# Altium PCB A3000_4MB.pcbdoc
Units mil, origin at the board's own origin, x right, y up, seen from the top; angles counter-clockwise.
Board outline 6800 x 990 mil, 4 copper layers (TopLayer, GND, VCC, BottomLayer), stack 65.297 mil thick; 13 components, 51 nets, 160 pads, 86 vias.
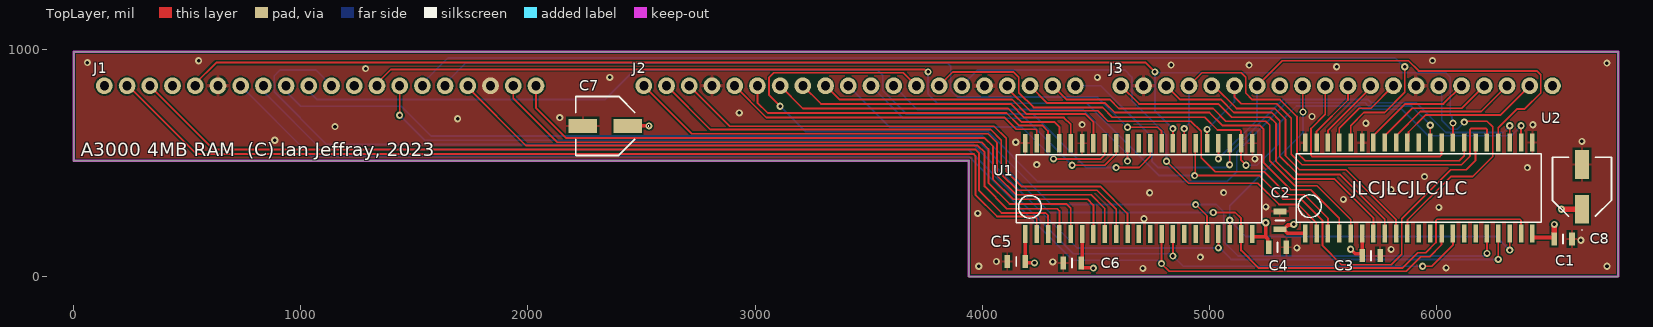
[diagram p0: TopLayer view]
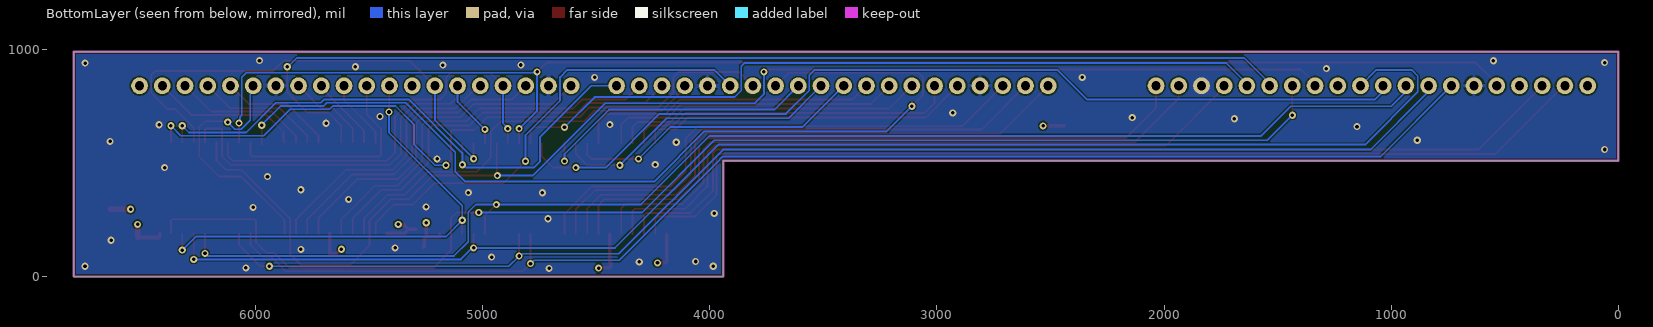
[diagram p1: BottomLayer view, seen from below]
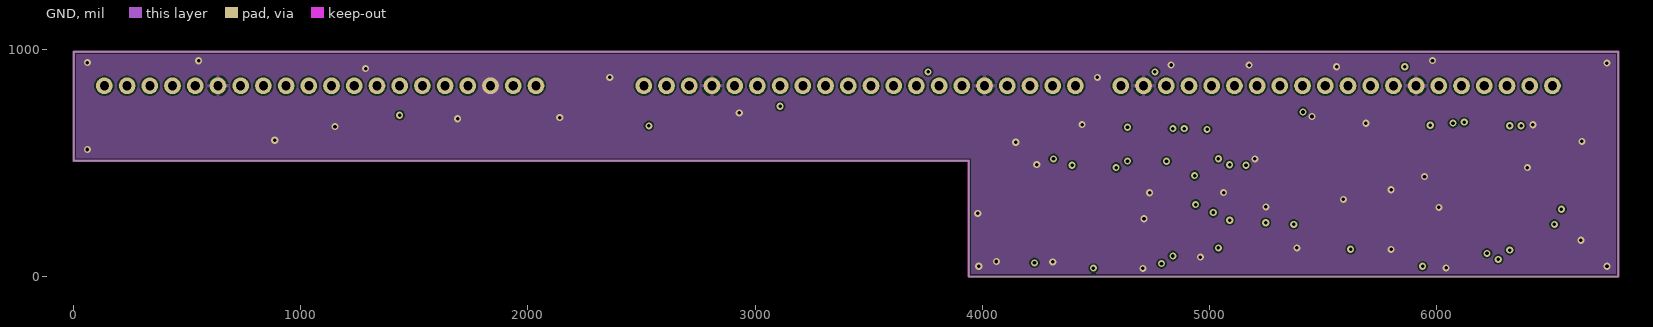
[diagram p2: GND]
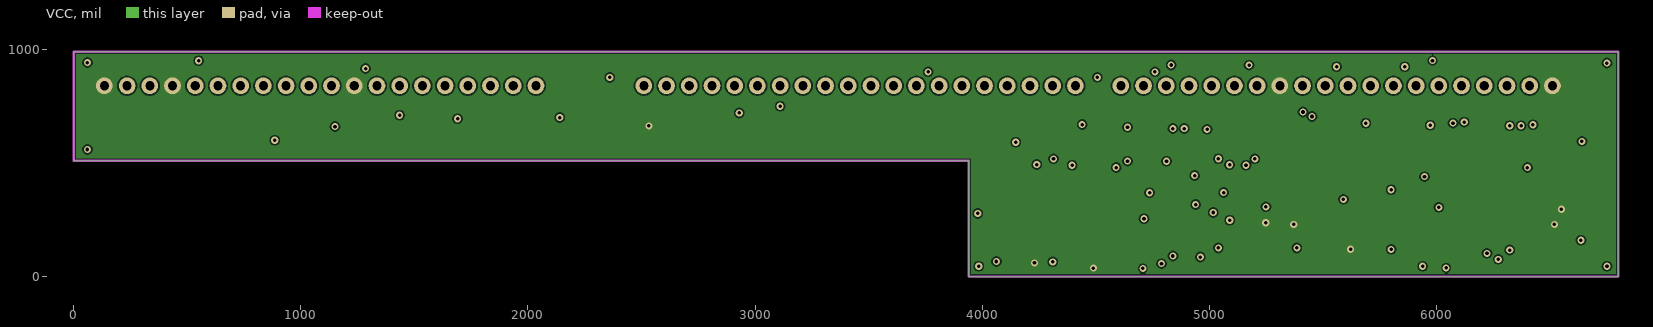
[diagram p3: VCC]
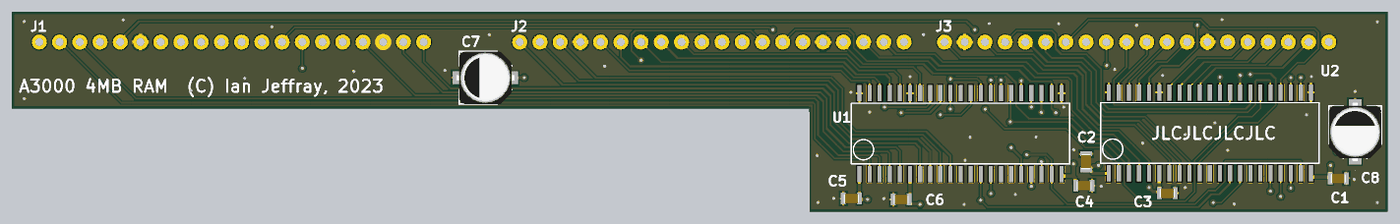
[diagram p4: 3D render of the assembled board from above, using the file's embedded part models]

## Layer stack, top to bottom
TopSolder: solder mask 0.3941, Solder Resist, Dk 3.5
TopLayer: signal copper 1.4169
Dielectric 1: prepreg 8.2, PP-022, Dk 4.5
GND: signal copper 1.378
Dielectric 2: core 43.3071, Core-043, Dk 4.3
VCC: signal copper 1.378
Dielectric 3: prepreg 8.2, PP-022, Dk 4.5
BottomLayer: signal copper 1.4169
BottomSolder: solder mask 0.3941, Solder Resist, Dk 3.5

## Board outline
3940,0 3940,510 0,510 0,990 6800,990 6800,0

## Design rules (kind name [scope] priority, off if disabled: settings)
BoardOutlineClearance [All] p1: gap=11.81 ignorepadtopadclearanceinfootprint=FALSE
Clearance [All] p1: gap=6.69 ignorepadtopadclearanceinfootprint=FALSE except(11.81: Via-Via; 19.68: Via-Hole)
ComponentClearance ComponentClearance_Z2_Z3 [(InComponent('Z2') OR InComponent('Z3')) vs InComponent('No Component')] p1: gap=0 collisioncheckmode=3 verticalgap=0 showdistances=FALSE
ComponentClearance ComponentClearance_U4_J104 [All] p2: gap=0 collisioncheckmode=3 verticalgap=0 showdistances=FALSE
ComponentClearance ComponentClearance_J3_J4 [InComponent('J3') vs InComponent('J4')] p3: gap=0 collisioncheckmode=3 verticalgap=0 showdistances=FALSE
ComponentClearance ComponentClearance_J103_J104 [InComponent('J103') vs InComponent('J104')] p4: gap=0 collisioncheckmode=3 verticalgap=0 showdistances=FALSE
ComponentClearance [All] p5: gap=10 collisioncheckmode=3 verticalgap=10 showdistances=FALSE
DiffPairsRouting [InDifferentialPairClass('All Differential Pairs')] p1: maxlimit=10 minlimit=4.51 mostfreqgap=6.69 toplayer_mingap=6.69 toplayer_minwidth=7.87 toplayer_maxwidth=15 toplayer_prefwidth=9.32 midlayer1_prefgap=4.53 midlayer1_minwidth=15 midlayer1_maxwidth=15 midlayer1_prefwidth=15 midlayer2_prefgap=4.53 midlayer2_minwidth=15 midlayer2_maxwidth=15 midlayer2_prefwidth=15 bottomlayer_mingap=6.69 bottomlayer_minwidth=7.87 bottomlayer_maxwidth=15 bottomlayer_prefwidth=9.32 maxuncoupledlength=500
FabricationTestPointUsage TestPointUsage [All] p1: valid=0 allowmultiple=FALSE
FabricationTestpoint Testpoint [All] p1: side=3 testpointundercomponent=TRUE minsize=40 maxsize=100 preferedsize=60 minholesize=20 maxholesize=40 preferedholesize=32 testpointgrid=1 allowsidetop=TRUE allowsidebottom=TRUE usegrid=TRUE gridtolerance=0.01
HoleSize [All] p1: absolutevalues=TRUE maxlimit=216.54 minlimit=7.87 maxpercent=80.000 minpercent=20.000
HoleToHoleClearance [All] p1: gap=9.84 allowstackedmicrovias=FALSE
MinimumSolderMaskSliver [All] p1: minsoldermaskwidth=0.79
PlaneClearance [All] p1: clearance=7.87
PlaneConnect [All] p1: pad.planeconnectstyle=Relief pad.reliefexpansion=20 pad.reliefentries=4 pad.reliefconductorwidth=10 pad.reliefairgap=10 via.planeconnectstyle=Direct via.reliefexpansion=20 via.reliefentries=4 via.reliefconductorwidth=10 via.reliefairgap=10
PolygonConnect [All] p1: thpad.connectstyle=Relief thpad.reliefconductorwidth=10 thpad.reliefentries=4 thpad.polygonreliefangle="90 Angle" thpad.airgapwidth=10 smdpad.connectstyle=Relief smdpad.reliefconductorwidth=10 smdpad.reliefentries=4 smdpad.polygonreliefangle="90 Angle" smdpad.airgapwidth=10 via.connectstyle=Direct via.reliefconductorwidth=10 via.reliefentries=4 via.polygonreliefangle="90 Angle" via.airgapwidth=10
RoutingLayers [All] p1: top layer_v5=TRUE mid layer 1_v5=FALSE mid layer 2_v5=FALSE bottom layer_v5=TRUE
RoutingVias [All] p1: holewidth=15.75 width=31.5 viastyle="Through Hole" minholewidth=15.75 minwidth=31.5 maxholewidth=15.75 maxwidth=31.5
SilkToSilkClearance [All] p1: silktosilkclearance=3.94
SilkToSolderMaskClearance SilkscreenOverComponentPads [IsPad] p1: minsilkscreentomaskgap=3.94 clearancetoexposedcopper=TRUE
SolderMaskExpansion [All] p1: expansion=2.95 istentingtop=FALSE
Width [All] p1: maxlimit=196.85 minlimit=5.91 preferedwidth=7.87
18 further rules are at their usual default settings.

## Components (designator, comment, footprint, x,y, rotation, side; value= is the part's Value field where it differs from the comment)
C1 "100nF" CAPC2012X145N 6556.87,164.88 r0 top
C2 "100nF" CAPC2012X145N 5310,247.16 r90 top
C3 "100nF" CAPC2012X145N 5711.86,92.08 r0 top
C4 "100nF" CAPC2012X145N 5299.57,129 r0 top
C5 "100nF" CAPC2012X145N 4149.41,65.97 r180 top
C6 "100nF" CAPC2012X145N 4395.58,60 r180 top
C7 "47uF" EEE1AA101SP 2340,663.25 r180 top
C8 "47uF" EEE1AA101SP 6640,395.18 r90 top
J1 "CONN_20" 1X20 135,840 r0 top locked
J2 "CONN_20" 1X20 2510,840 r0 top locked
J3 "CONN_20" 1X20 4610,840 r0 top locked
U1 "IS41C16105C" SOJ-42 4689.41,387 r0 top locked
U2 "IS41C16105C" SOJ-42 5921.86,390 r0 top locked

## Footprints (in the part's own frame and the unit in brackets; to place one, negate y for a bottom-side part, rotate by r counter-clockwise, add the part's x,y. Pads: shape width x height; smd on the part's side, far side on the other; paste and mask are expansions set on the pad)
1X20 [mil] "1X20"
  round 74 hole 40: 1(0,0) 2(100,0) 3(200,0) 4(300,0) 5(400,0) 6(500,0) 7(600,0) 8(700,0) 9(800,0) 10(900,0) 11(1000,0) 12(1100,0) 13(1200,0) 14(1300,0) 15(1400,0) 16(1500,0) 17(1600,0) 18(1700,0) 19(1800,0) 20(1900,0)
  body extent -37,-37 1937,37, height 150
CAPC2012X145N [mm]
  rect 0.62x1.47 smd: 1(-1,0) 2(1,0)
  silkscreen extent 0,-0.52 0,0.53, body extent -1,-0.63 1,0.63, height 1.45
EEE1AA101SP [mm]
  rect 3.2x1.6 smd: 1(-2.5,0) 2(2.5,0)
  silkscreen extent -4.88,-3.3 3.3,3.3, body extent 0,0 0,0
SOJ-42 [mil]
  rect 20x80 smd mask+7.87: 1(-500,-200) 2(-450,-200) 3(-400,-200) 4(-350,-200) 5(-300,-200) 6(-250,-200) 7(-200,-200) 8(-150,-200) 9(-100,-200) 10(-50,-200) 11(0,-200) 12(50,-200) 13(100,-200) 14(150,-200) 15(200,-200) 16(250,-200) 17(300,-200) 18(350,-200) 19(400,-200) 20(450,-200) 21(500,-200) 22(500,200) 23(450,200) 24(400,200) 25(350,200) 26(300,200) 27(250,200) 28(200,200) 29(150,200) 30(100,200) 31(50,200) 32(0,200) 33(-50,200) 34(-100,200) 35(-150,200) 36(-200,200) 37(-250,200) 38(-300,200) 39(-350,200) 40(-400,200) 41(-450,200) 42(-500,200)
  silkscreen extent -540,-150 540,150

## Part data
C1 C2 C3 C4 C5 C6: library part C2012X7R1H104K125AM, "Capacitor", Manufacturer_Name=TDK, Mouser Part Number=810-C2012X7R1H104KT5, Arrow Part Number=C2012X7R1H104K125AM, Arrow Price/Stock=https://www.arrow.com/en/products/c2012x7r1h104k125am/tdk, Datasheet Link=https://product.tdk.com/info/en/catalog/datasheets/mlcc_commercial_midvoltage_en.pdf, Height=1.45mm, Manufacturer_Part_Number=C2012X7R1H104K125AM, Mouser Price/Stock=https://www.mouser.com/Search/Refine.aspx?Keyword=810-C2012X7R1H104KT5
C7 C8: library part EEE1VA470WP, "Capacitor Polarised", Manufacturer_Name=Panasonic, Datasheet Link=http://industrial.panasonic.com/cdbs/www-data/pdf/RDE0000/ABA0000C1145.pdf, Height=7.8mm, Manufacturer_Part_Number=EEE1VA470WP
U1 U2: library part DRAM_1MX16_SOJ
J1 J2 J3: DeviceSetName=CONN_20, GateName_1=G$1, LibraryName=SparkFun-Connectors, SymbolName_1=CONN_20

## Via types
v1: diameter 31.5, hole 15.75, TopLayer to BottomLayer, tented both sides, 86 vias

## Nets (pads, with @x,y where several pads share a name; then routed paths per layer and width w, separated by ;. In a path a pad name is that pad's centre, name@x,y a point inside that pad or via, vN(x,y) a via of type N, cw(c..) or ccw(c..) an arc to the next point about the centre after c; other vN are vias at no path point)
A0: J1.9 U1.17 U2.17 | length 5942.1
  TopLayer w7.87: v1(4939.41,317.16) 4989.41,267.16 U1.17 ; v1(6221.86,102.16) U2.17
  BottomLayer w7.87: J1.9@910,840 1000,750 1441.5,750 1572.34,619.16 4000.84,619.16 4302.84,317.16 v1(4939.41,317.16) 5029.84,317.16 5062.58,284.42 5062.58,154.1 5126.02,90.67 6210.37,90.67 v1(6221.86,102.16)
A1: J1.11 U1.18 U2.18 | length 6231.5
  TopLayer w7.87: v1(5039.41,126.25) U1.18 ; v1(6271.86,75.78) U2.18
  BottomLayer w7.87: J1.11 1065,910 910,910 883,883 883,812.84 1114.68,581.16 3962.1,581.16 4417.01,126.25 5045.01,126.25 5095.48,75.78 v1(6271.86,75.78)
A2: J3.9 U1.19 U2.19 | length 2147.4
  TopLayer w7.87: U1.19 v1(5089.41,247.75) ; J3.9 5410.93,839.07 5410.93,725.42 v1(5411.86,724.49) ; v1(6321.86,116.69) U2.19
  BottomLayer w7.87: v1(5411.86,724.49) 5411.86,634.02 5089.41,311.57 v1(5089.41,247.75) 5161,176.16 6262.39,176.16 v1(6321.86,116.69)
A3: J1.14 U1.20 U2.20 | length 5633.6
  TopLayer w7.87: v1(1435,710.42) J1.14 ; v1(5016.58,282.16) 5113.58,282.16 5139.41,256.33 U1.20 5139.41,115.16 5216.98,37.59 5849.01,37.59 5916.26,104.84 5951.74,104.84 5997.29,150.39 5997.29,247.78 6001.9,252.4 6367.25,252.4 6371.86,247.78 U2.20
  BottomLayer w7.87: v1(1435,710.42) 1545.26,600.16 3979.75,600.16 4297.75,282.16 v1(5016.58,282.16)
A4: J2.14 U1.23 U2.23 | length 3177.3
  TopLayer w7.87: J2.14 3871.16,901.16 4136.41,901.16 4160.77,876.8 4160.77,809.97 4226.1,744.65 4529.09,744.65 4571.88,701.86 4978.88,701.86 5035.58,645.16 5134.8,645.16 5139.41,640.55 5139.41,511.75 v1(5161,490.16) ; U2.23 v1(6371.86,663.89)
  BottomLayer w7.87: v1(5161,490.16) 5209.3,490.16 5302.37,583.22 5302.37,670.09 5383.14,750.87 5659.42,750.87 5673.99,736.3 5846.48,736.3 5962.86,619.92 6327.89,619.92 v1(6371.86,663.89)
A5: J2.20 U1.24 U2.24 | length 2520
  TopLayer w7.87: v1(5088.58,492.38) 5089,492.8 5089,556.74 5089.41,557.16 U1.24 ; U2.24 v1(6321.86,663.89)
  BottomLayer w7.87: J2.20 4522.2,840 4746.64,615.57 4746.64,507.82 4762.07,492.38 4762.07,491.79 4773.86,480 5072.16,480 5084.54,492.38 v1(5088.58,492.38) 5088.58,543.58 5325,780 5697.11,780 5711.68,765.43 5910.03,765.43 6040.98,634.49 6292.46,634.49 v1(6321.86,663.89)
A6: J3.7 U1.25 U2.25 | length 2175.1
  TopLayer w7.87: v1(5039.41,518.76) U1.25 ; J3.7 5320,950 5876.47,950 5921.05,905.42 6441.32,905.42 6458.58,888.16 6458.58,808.16 6388.58,738.16 6354.86,738.16 6271.86,655.16 U2.25
  BottomLayer w7.87: v1(5039.41,518.76) 5210,689.35 J3.7
A7: J3.6 U1.26 U2.26 | length 1873
  TopLayer w7.87: U1.26 4989.41,647.99 v1(4989.58,648.16) ; J3.6 5110,791.67 5140.51,761.16 5295.66,761.16 5360.58,696.23 5360.58,539.44 5407.64,492.38 6109.81,492.38 6147.23,529.8 6147.23,647.25 6151.84,651.86 6217.25,651.86 6221.86,647.25 U2.26
  BottomLayer w7.87: v1(4989.58,648.16) 5110,768.58 J3.6
A8: J1.13 U1.27 U2.27 | length 5855.4
  TopLayer w7.87: J1.13 1335,850 1397,912 3745.16,912 3756,901.16 v1(3761.58,901.16) ; U1.27 4937.21,584.79 4937.21,446.87 v1(4935,444.66) 5220.59,444.66 5325.25,340 5404.74,340 5498.16,246.58 5498.16,135.45 5581.45,52.16 5695.58,52.16 5800,52.16 5847,99.16 5847,254.89 6062.11,470 6130.42,470 6171.86,511.44 U2.27
  BottomLayer w7.87: v1(3761.58,901.16) 3761.58,803.16 3801.51,763.23 4460.52,763.23 4779.09,444.66 v1(4935,444.66)
A9: J3.4 U1.28 U2.28 | length 1858.1
  TopLayer w7.87: U1.28 v1(4889.41,651.52) ; J3.4 4967.16,897.16 5140.41,897.16 5159.58,877.99 5159.58,808.16 5188.58,779.16 5310.51,779.16 5385,704.67 5385,546.42 5421.26,510.16 6100.18,510.16 6121.86,531.84 U2.28
  BottomLayer w7.87: v1(4889.41,651.52) 4889.41,654.89 4910,675.48 J3.4
CAS0: J1.10 U1.31 | length 4103.8
  TopLayer w7.87: v1(4589.41,480) 4690,480 4739.41,529.41 U1.31
  BottomLayer w7.87: J1.10@1010,840 1070,780 2340,780 2470,910 3538.16,910 3561.58,886.58 3561.58,819.16 3664.58,716.16 4221.51,716.16 4457.66,480 v1(4589.41,480)
CAS1: J1.16 U1.30 | length 3441.2
  TopLayer w7.87: v1(4639.41,657.23) 4771.38,657.23 4789.41,639.2 U1.30
  BottomLayer w7.87: J1.16 1635,850 1725,940 3847.74,940 3861.58,926.16 3861.58,819.16 3890.74,790 4506.65,790 v1(4639.41,657.23)
CAS2: J2.13 U2.31 | length 4147.4
  TopLayer w7.87: v1(3110,750) 3061.58,798.42 3061.58,876.74 3082,897.16 3652.84,897.16 J2.13 ; U2.31@5971.99,581.54 v1(5971.99,666.17)
  BottomLayer w7.87: v1(3110,750) 3220.84,639.16 4023.33,639.16 4244.2,418.29 5076.07,418.29 5120,462.22 5120,547.42 5338.02,765.43 5685.17,765.43 5699.73,750.87 5889.31,750.87 5971.99,668.19 v1(5971.99,666.17)
CAS3: J3.10 U2.30 | length 965.9
  TopLayer w7.87: J3.10 5510,714.52 5447,651.52 5447,533.86 5451.61,529.25 6015.25,529.25 6021.86,535.87 U2.30
D0: J1.3 U1.3 | length 4369.8
  TopLayer w7.87: J1.3 615,560 3969.46,560 3985,544.46 3985,380 4085,280 4279.32,280 4289.41,269.91 U1.3
D1: J1.2 U1.2 | length 4415.6
  TopLayer w7.87: J1.2 240,840 540,540 3961.7,540 3969.51,532.19 3969.51,359.91 4064.66,264.76 4229.61,264.76 4239.41,254.96 U1.2
D2: J1.19 U1.5 | length 2910.7
  TopLayer w7.87: J1.19 1935,784.43 2128.22,591.21 3997.44,591.21 4027,561.65 4027,413 4120,320 4369.41,320 4389.41,300 U1.5
D3: J1.17 U1.4 | length 3026.4
  TopLayer w7.87: J1.17 1735,833 1991.36,576.64 3980.2,576.64 4010,546.84 4010,396.91 4108.18,298.73 4329.41,298.73 4339.41,288.73 U1.4
D4: J1.20 U1.7 | length 2941.1
  TopLayer w7.87: J1.20 2035,742.43 2166.77,610.66 4009.35,610.66 4047,573 4047,429.16 4136.16,340 4464.18,340 4489.41,314.76 U1.7
D5: J2.1 U1.8 | length 2450.8
  TopLayer w7.87: J2.1 2721.07,628.93 4025.03,628.93 4064.66,589.29 4064.66,444.66 4149.41,359.91 4479.41,359.91 4539.41,299.91 U1.8
D6: J2.3 U1.10 | length 2337.4
  TopLayer w7.87: J2.3 2888,662 4051.56,662 4105.04,608.51 4105.04,464.2 4172.33,396.91 4520,396.91 4639.41,277.5 U1.10
D7: J2.2 U1.9 | length 2401.2
  TopLayer w7.87: J2.2 2802.57,647.43 4037.49,647.43 4083.84,601.08 4083.84,451.41 4155.25,380 4505.08,380 4589.41,295.67 U1.9
D8: J2.5 U1.41 | length 1467.4
  TopLayer w7.87: J2.5 3050,700 4098.09,700 4149.89,648.2 4234.8,648.2 4239.41,643.59 U1.41
D9: J2.6 U1.40 | length 1459.1
  TopLayer w7.87: J2.6 3010,765.57 3055.57,720 3102.91,720 4106.43,720 4161,665.43 4264.35,665.43 4289.41,640.37 U1.40
D10: J2.8 U1.38 | length 1332.8
  TopLayer w7.87: J2.8 3290,760 4124.57,760 4184.57,700 4359.41,700 4389.41,670 U1.38
D11: J2.7 U1.39 | length 1377
  TopLayer w7.87: J2.7 3210,740 4113.93,740 4173.93,680 4319.41,680 4339.41,660 U1.39
D12: J2.9 U1.36 | length 1339.9
  TopLayer w7.87: J2.9 3370,780 4130.62,780 4195.11,715.51 4455.9,715.51 4489.41,682 U1.36
D13: J2.10 U1.35 | length 1321
  TopLayer w7.87: v1(4313.58,518.16) 4521.41,518.16 4539.41,536.16 U1.35
  BottomLayer w7.87: J2.10 3590.84,659.16 4172.58,659.16 v1(4313.58,518.16)
D14: J2.12 U1.33 | length 1264
  TopLayer w7.87: v1(4639.41,508.16) U1.33
  BottomLayer w7.87: J2.12 3714.84,735.16 4443.59,735.16 4639.41,539.33 v1(4639.41,508.16)
D15: J2.11 U1.34 | length 1291.4
  TopLayer w7.87: v1(4395.58,490.16) 4538.58,490.16 4589.41,540.99 U1.34
  BottomLayer w7.87: J2.11 3652.84,697.16 4188.58,697.16 v1(4395.58,490.16)
D16: J2.15 U2.2 | length 2043.8
  TopLayer w7.87: v1(4811,507.82) 4907.77,411.05 5212.79,411.05 5306.55,317.29 5390.46,317.29 5470.55,237.2 5470.55,191.31 U2.2
  BottomLayer w7.87: J2.15 3980,910 4627,910 4658.58,878.42 4658.58,775.28 4811,622.86 v1(4811,507.82)
D17: J2.17 U2.3 | length 1793.4
  TopLayer w7.87: J2.17 4110,830 4209.92,730.08 4507.64,730.08 4553.56,684.16 4918.58,684.16 4963.79,638.95 4963.79,523.78 5026.41,461.16 5241.57,461.16 5342.82,359.91 5418.45,359.91 5521.86,256.5 U2.3
D18: J2.19 U2.5 | length 1709.4
  TopLayer w7.87: J2.19 4370,780 4560.57,780 4600.57,740 5016.26,740 5072.11,684.16 5248.77,684.16 5265.75,667.18 5265.75,509.29 5375.54,399.5 5473.5,399.5 5621.86,251.14 U2.5
D19: J2.18 U2.4 | length 1756
  TopLayer w7.87: J2.18 4286.3,763.7 4541.51,763.7 4582.98,722.23 5000,722.23 5056.8,665.43 5221.21,665.43 5238.58,648.06 5238.58,501.42 5357.97,382.03 5446.33,382.03 5571.86,256.5 U2.4
D20: J3.1 U2.7 | length 1518.5
  TopLayer w7.87: J3.1 4690,760 5039.41,760 5097.55,701.86 5265.75,701.86 5293.27,674.34 5293.27,507.88 5371.15,430 5550,430 5721.86,258.14 U2.7
D21: J3.3 U2.8 | length 1359.5
  TopLayer w7.87: J3.3 4870,780 5049.41,780 5107.18,722.23 5274.51,722.23 5310,686.74 5310,530 5390,450 5574.26,450 5771.86,252.4 U2.8
D22: J3.15 U2.10 | length 1103.4
  TopLayer w7.87: U2.10 5871.86,249.75 6062.11,440 6158.26,440 6247,528.74 6247,659.02 6221.86,684.16 6126.07,684.16 v1(6121.86,679.95)
  BottomLayer w7.87: J3.15 6022.65,827.35 6022.65,687.93 6061.53,649.05 6090.97,649.05 v1(6121.86,679.95)
D23: J3.5 U2.9 | length 1209.9
  TopLayer w7.87: J3.5 5019.61,840 5119.61,740 5287,740 5335,692 5335,531.63 5396.63,470 5601.33,470 5821.86,249.47 U2.9
D24: J3.12 U2.40 | length 327.9
  TopLayer w7.87: U2.40 5522.33,590.46 5522.33,644.56 5710,832.23 J3.12
D25: J3.11 U2.41 | length 307.2
  TopLayer w7.87: U2.41 5471.86,639.24 5610,777.37 J3.11
D26: J3.13 U2.39 | length 379
  TopLayer w7.87: U2.39 5571.86,653.73 5659.55,741.42 5711.42,741.42 J3.13
D27: J1.15 U2.38 | length 4882.9
  TopLayer w7.87: U2.38 5621.86,663.89 5680.2,722.23 5771.15,722.23 5860,811.09 v1(5860,923.54)
  BottomLayer w7.87: J1.15 1535,850 1647.16,962.16 5817.84,962.16 5856.46,923.54 v1(5860,923.54)
D28: J3.18 U2.34 | length 609.3
  TopLayer w7.87: U2.34 5821.86,620 5928.72,726.85 6196.85,726.85 J3.18
D29: J3.16 U2.36 | length 509.3
  TopLayer w7.87: U2.36 5721.86,620 5861.86,760 6030,760 J3.16
D30: J3.17 U2.35 | length 559.3
  TopLayer w7.87: U2.35 5771.86,620 5893.28,741.42 6111.42,741.42 J3.17
D31: J3.19 U2.33 | length 666.1
  TopLayer w7.87: U2.33 5876.47,594.61 5876.47,636.35 5951.04,710.91 6280.91,710.91 J3.19
GND: C1.2 C2.2 C3.2 C4.2 C5.2 C6.2 C7.2 C8.2 J1.6 J1.18 J2.4 J2.16 J3.2 J3.14 U1.22 U1.37 U1.42 U2.22 U2.37 U2.42
  other v1: 4706.87,35.81 6042.15,38.33 6750.29,45.58 3984.13,45.72 4310.29,64.88 4062.32,66.39 4959.96,85.81 5799.87,119.93 5385,126.25 6635.54,160 4711.91,254.33 3980.29,277.92 6010,304.64 5248.77,307 5590,340 4736.53,369.37 5062.58,370 5800,382.03 5947,440 6400,480 4239.7,493.22 5200,518.16 60.29,559.58 4147.29,591.63 6640,595.33 885,600.16 1150.29,660.42 6424.28,668.58 4439.57,669.16 5688.57,674.76 1690,695 2140,700 5451.61,704.67 2930.29,720.42 2360,876.74 4506.65,877 1285,915.78 5560,923.54 4831.31,931.49 5174.56,930.74 6750,940 60.29,942.16 550,950 5982.15,950.74
OE: J1.5 U1.29 U2.29 | length 6238.9
  TopLayer w7.87: J1.5 535,850 627.16,942.16 4719,942.16 v1(4760,901.16) ; U1.29 v1(4839.41,651.52) ; U2.29 v1@6071.86,674.34
  BottomLayer w7.87: v1(4839.41,651.52) 4760,730.94 v1(4760,901.16) 4764,897.16 5987,897.16 6040.83,897.16 6060,877.99 6060,710.91 6067.94,702.98 6067.94,679.95 v1(6072.46,675.43)
RAS: J1.8 U1.14 U2.14 | length 5767.5
  TopLayer w7.87: v1(4839.41,90.58) U1.14 ; v1(5938.58,45.16) 5978.8,45.16 6071.86,138.22 U2.14
  BottomLayer w7.87: J1.8 847.65,827.35 847.65,802.35 1090.84,559.16 3941,559.16 4400.09,100.06 4823.53,100.06 4833.02,90.58 v1(4839.41,90.58) 4884.83,45.16 v1(5938.58,45.16)
VCC: C1.1 C2.1 C3.1 C4.1 C5.1 C6.1 C7.1 C8.1 J1.1 J1.4 J1.12 J3.8 J3.20 U1.1 U1.6 U1.21 U2.1 U2.6 U2.21 | length 1251.9
  TopLayer w15.75: C7.1 2438.84,663.67 v1(2532.22,663.67) ; U1.1 4189.41,72.23 4188.78,71.61 C5.1 4188.78,64.75 4193.11,60.42 v1(4229.7,60.42) ; U1.6 4439.41,64.46 C6.1 4434.95,43.27 4439.28,38.94 4487.51,38.94 v1(4489.41,37.04) ; U1.21 5189.41,176.16 5246.65,176.16 5255.87,166.93 5255.87,133.33 C4.1 ; 5248,174.81 v1(5248,237) ; C2.1@5293.27,207.79 C2.1 C2.1@5326.73,207.79 ; v1(5371.15,230) 5368.14,226.99 5345.93,226.99 C2.1@5326.73,207.79 ; U2.1 5344.52,190 C2.1@5326.73,207.79 ; v1(5621.73,120.06) 5641.73,100.06 5664.51,100.06 C3.1 5672.49,108.81 5671.86,109.44 U2.6 ; U2.21 6421.86,174.17 6423.99,172.05 C1.1@6512.94,172.05
  TopLayer w23.62: C1.1@6517.11,172.05 6517.89,172.83 6517.89,229.11 v1(6518.78,230) ; v1(6549.58,296.63) 6549.71,296.76 C8.1
WE: J1.7 U1.13 U2.13 | length 5855.3
  TopLayer w7.87: U1.13 4789.25,186.83 4789.25,57.21 v1(4789.08,57.04) 4823.1,23.02 5865.98,23.02 5930.12,87.16 5969.29,87.16 6021.86,139.73 U2.13
  BottomLayer w7.87: J1.7 1046.84,528.16 3941.84,528.16 3944.25,525.75 3946.52,525.75 3955.75,516.52 3955.75,514.25 4398.39,71.61 4772.66,71.61 4787.22,57.04 v1(4789.08,57.04)
pads on no net: U1.11 U1.12 U1.15 U1.16 U1.32 U2.11 U2.12 U2.15 U2.16 U2.32

## Polygon pours and split planes (outlines as drawn)
VCC on VCC "NONET_L-01_P-001" (solid, pour order 2): 0,0 6800,0 6800,990 0,990
GND on GND "NONET_L-01_P-001" (solid, pour order 1): 0,0 6800,0 6800,990 0,990
GND on BottomLayer "NONET_L-01_P-001" (solid, remove dead copper, pour order 3): 0,0 6800,0 6800,990 0,990
GND on TopLayer "NONET_L-01_P-001" (solid, remove dead copper, pour order 0): 0,0 6800,0 6800,990 0,990

## Keep-outs
KeepOutLayer:
  the board outline again, w10

## Silkscreen, mask and mechanical layers (free items; w line width, h text height)
TopOverlay:
  text "A3000 4MB RAM  (C) Ian Jeffray, 2023" at 30,530 h60
  text "JLCJLCJLCJLC" at 5625.75,360.34 h60